# EAGLE board circuitPendulumController01 (EAGLE 6.6.0)
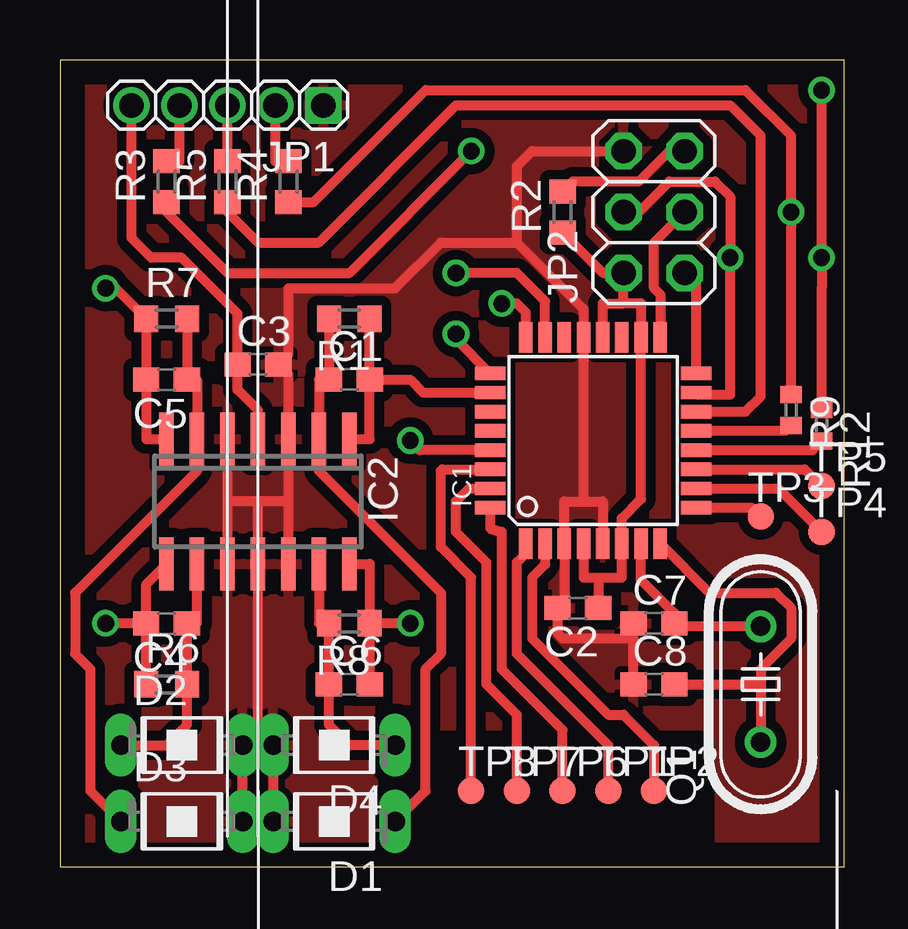
[diagram p0: board, top side]
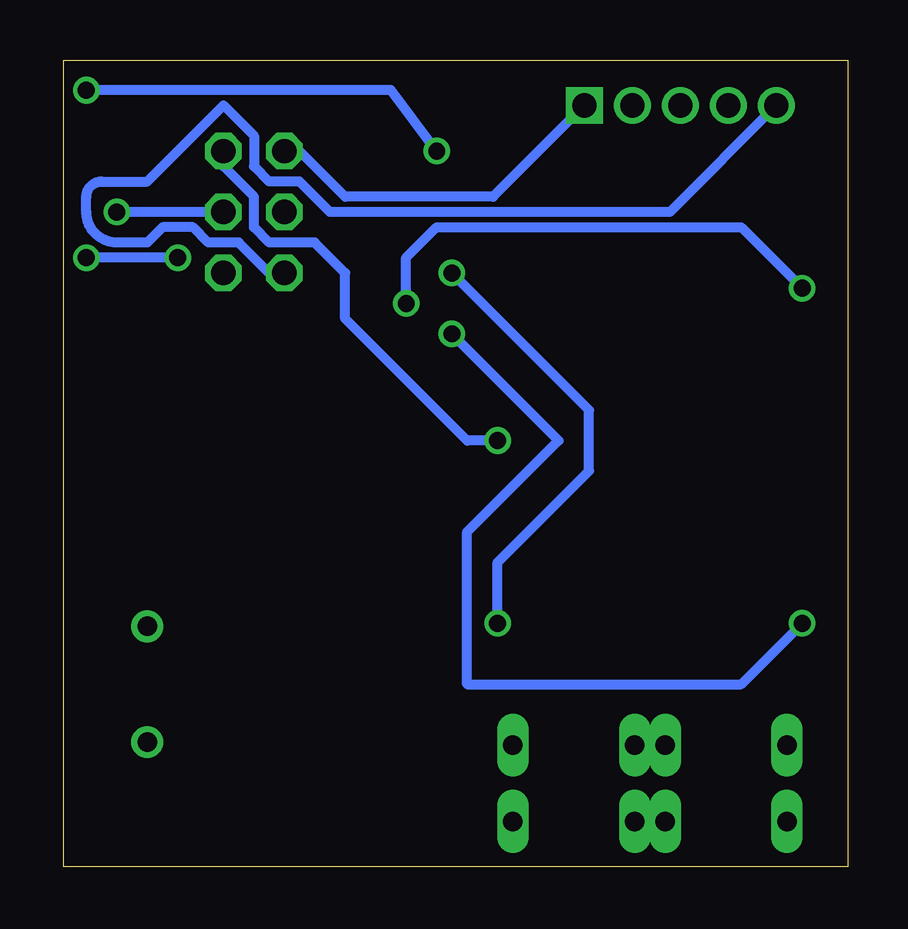
[diagram p1: board, bottom side, seen from below]

Size 32.69 x 33.65 mm. Coordinates in mm from the lower left corner, seen from the top.
Outline: 0,0 32.69,0 32.69,33.65 0,33.65 0,0
Copper layers (1*16): Top 0.035mm / dielectric 1.5mm / Bottom 0.035mm
Design rules "default": minimum track width 10mil, minimum drill 24mil, track to track 8mil, track to pad 8mil, pad to pad 8mil, via to via 8mil, smd to smd 8mil, copper to edge 40mil, drill to drill 8mil, minimum pad ring 10mil, minimum via ring 8mil, stop-mask expansion 4mil, vias tented up to drill 0mil, thermal gap 10mil
tRestrict: area 15.2,0 to 26.7,5.1

## Footprints (pad centres in the part's own frame; a part is rotated, then mirrored left to right if it is on the bottom)
C0603 = smd 1.1 x 1: 1 -0.85,0; 2 0.85,0
BPW32 = drill 0.813 long: A 0,2.54; K 0,-2.54
TQFP32-08 = smd 1.27 x 0.559: 1 -4.293,2.8; 2 -4.293,2; 3 -4.293,1.2; 4 -4.293,0.4; 5 -4.293,-0.4; 6 -4.293,-1.2; 7 -4.293,-2; 8 -4.293,-2.8; 17 4.293,-2.8; 18 4.293,-2; 19 4.293,-1.2; 20 4.293,-0.4; 21 4.293,0.4; 22 4.293,1.2; 23 4.293,2; 24 4.293,2.8 | smd 0.559 x 1.27: 9 -2.8,-4.293; 10 -2,-4.293; 11 -1.2,-4.293; 12 -0.4,-4.293; 13 0.4,-4.293; 14 1.2,-4.293; 15 2,-4.293; 16 2.8,-4.293; 25 2.8,4.293; 26 2,4.293; 27 1.2,4.293; 28 0.4,4.293; 29 -0.4,4.293; 30 -1.2,4.293; 31 -2,4.293; 32 -2.8,4.293
SO14 = smd 0.6 x 2.2: 1 -3.81,-2.6; 2 -2.54,-2.6; 3 -1.27,-2.6; 4 0,-2.6; 5 1.27,-2.6; 6 2.54,-2.6; 7 3.81,-2.6; 8 3.81,2.6; 9 2.54,2.6; 10 1.27,2.6; 11 0,2.6; 12 -1.27,2.6; 13 -2.54,2.6; 14 -3.81,2.6
1_05X2MM = drill 1.016 pad 1.3 square: 1 -4,0 | drill 1.016 pad 1.3: 2 0,0; 3 -2,0; 4 2,0; 5 4,0
2X03 = drill 1.016 octagon: 1 -2.54,-1.27; 2 -2.54,1.27; 3 0,-1.27; 4 0,1.27; 5 2.54,-1.27; 6 2.54,1.27
HC49/S = drill 0.813: 1 -2.413,0; 2 2.413,0
R0603 = smd 1 x 1.1: 1 -0.85,0; 2 0.85,0
R0402 = smd 0.7 x 0.9: 1 -0.65,0; 2 0.65,0
TP11R = smd 1.1 x 1.1: TP 0,0

## Placement (x,y rotation side)
C1  10pF  [C0603]  12.06,20.32 0 top
C2  100nF  [C0603]  21.59,10.79 180 top
C3  100nF  [C0603]  8.26,20.95 0 top
C4  10pF  [C0603]  4.45,10.16 180 top
C5  10pF  [C0603]  4.45,20.32 180 top
C6  10pF  [C0603]  12.06,7.62 0 top
C7  22pF  [C0603]  24.77,10.16 0 top
C8  22pF  [C0603]  24.77,7.62 0 top
D1  BPW32  [BPW32]  11.43,1.91 90 top
D2  BPW32  [BPW32]  5.08,5.08 270 top
D3  BPW32  [BPW32]  5.08,1.91 270 top
D4  BPW32  [BPW32]  11.43,5.08 90 top
IC1  MEGA8-AI  [TQFP32-08]  22.23,17.78 90 top
IC2  LM324D  [SO14]  8.26,15.24 180 top
JP1  Out  [1_05X2MM]  6.99,31.75 180 top
JP2  ICSP  [2X03]  24.77,27.3 90 top
Q1  16MHz  [HC49/S]  29.21,7.62 90 top
R1  1MOhm  [R0603]  12.06,22.86 180 top
R2  10kOhm  [R0603]  20.95,27.3 90 top
R3  100Ohm  [R0603]  4.45,28.57 90 top
R4  100Ohm  [R0603]  9.53,28.57 90 top
R5  100Ohm  [R0603]  6.99,28.57 90 top
R6  1MOhm  [R0603]  4.45,7.62 0 top
R7  1MOhm  [R0603]  4.45,22.86 0 top
R8  1MOhm  [R0603]  12.06,10.16 180 top
R9  JP1  [R0402]  30.48,19.05 270 top
R12  JP2  [R0402]  31.75,18.41 270 top
TP1  TPTP11R  [TP11R]  22.86,3.17 0 top
TP2  TPTP11R  [TP11R]  24.77,3.17 0 top
TP3  TPTP11R  [TP11R]  29.21,14.61 0 top
TP4  TPTP11R  [TP11R]  31.75,13.97 0 top
TP5  TPTP11R  [TP11R]  31.75,15.88 0 top
TP6  TPTP11R  [TP11R]  20.95,3.17 0 top
TP7  TPTP11R  [TP11R]  19.05,3.17 0 top
TP8  TPTP11R  [TP11R]  17.14,3.17 0 top

## Library data of the parts
C1-C8 R1-R9 R12 = resistor
D1-D4 = opto-trans-siemens; OC_FARNELL: unknown; OC_NEWARK: unknown
IC1 = atmel; MPN: ATMEGA8-16AU; OC_FARNELL: 9171371; OC_NEWARK: 73M8863
IC2 = linear
JP1 JP2 = pinhead
Q1 = crystal; OC_FARNELL: 1667008; OC_NEWARK: unknown
TP1-TP8 = testpad

## Nets
GND: C2.2 C3.2 C7.1 C8.1 D1.A D2.A D3.A D4.A IC1.3 IC1.5 IC1.21 IC2.3 IC2.5 IC2.10 IC2.11 IC2.12 JP1.1 JP2.6
MISO: IC1.16 JP2.1
MOSI: IC1.15 JP2.4 R3.1 R12.1
N$3: IC1.12 R12.2
N$4: IC1.13 R9.2
N$6: IC1.14 R5.1
N$7: C4.2 IC1.25 IC2.8 R6.1
N$8: C1.1 D1.K IC2.2 R1.2
N$9: C5.1 D3.K IC2.6 R7.2
N$10: C5.2 IC1.24 IC2.7 R7.1
N$11: C1.2 IC1.26 IC2.1 R1.1
N$12: C6.2 IC1.23 IC2.14 R8.1
N$13: C6.1 D4.K IC2.13 R8.2
N$14: C4.1 D2.K IC2.9 R6.2
N$15: C7.2 IC1.7 Q1.2
N$16: C8.2 IC1.8 Q1.1
N$17: IC1.1 TP1.TP
N$18: IC1.2 TP2.TP
N$19: IC1.9 TP3.TP
N$20: IC1.10 TP4.TP
N$21: IC1.11 TP5.TP
N$22: IC1.32 TP6.TP
N$23: IC1.31 TP7.TP
N$24: IC1.30 TP8.TP
RCK_OUT: JP1.2 R5.2
RST: IC1.29 JP2.5 R2.2
SCK: IC1.17 JP2.3 R4.1 R9.1
SCK_OUT: JP1.3 R4.2
SER_OUT: JP1.4 R3.2
VCC: C2.1 C3.1 IC1.4 IC1.6 IC1.18 IC1.20 IC2.4 JP1.5 JP2.2 R2.1

## Tracks (layer width: path | path; a pad name or v marks a point on that pad's centre or on a via)
GND
  Top 0.406: 9.53,15.24 IC2.3 9.53,20.54 C3.2 9.53,21.38 9.53,24.13 13.97,24.13 15.88,26.04 19.05,26.04 | IC2.10 6.99,15.24 | 6.99,15.24 IC2.5 | IC2.12 9.53,15.24 | 9.53,15.24 8.26,15.24 | 8.26,15.24 6.99,15.24 | IC1.5 22.62,15.24 21.82,15.24 | 21.82,15.24 21.02,15.24 IC1.3 21.02,11.08 C2.2 20.74,9.74 20.95,9.53 23.91,9.53 | 8.26,15.24 IC2.11 8.26,5.08 | 8.26,5.08 D2.A D3.A D1.A D4.A 8.26,5.08 | C8.1 23.91,9.53 | 23.91,9.53 C7.1 | JP2.6 19.68,29.84 19.05,29.21 19.05,26.04 | 19.05,26.04 21.82,23.26 IC1.21 21.82,15.24
  Bottom 0.406: JP1.1 14.79,27.94 20.95,27.94 22.86,29.84 JP2.6
  pour Top (isolate 0.406): 0,0 0,33.66 33.02,33.66 33.02,0
MISO
  Top 0.406: JP2.1 26.52,24.77 IC1.16
MOSI  (via drill 0.7)
  Top 0.406: IC1.15 26.61,19.68 27.94,19.68 v27.94,25.4 27.94,27.94 27.3,28.57 25.4,28.57 24.13,27.3 JP2.4 | R3.1 4.45,27.3 6.99,24.77 12.06,24.77 v17.14,29.84 | R12.1 31.75,24.13 v31.75,25.4 v31.75,32.38
  Bottom 0.406: v17.14,29.84 19.05,32.38 v31.75,32.38 | v27.94,25.4 v31.75,25.4
N$3
  Top 0.406: IC1.12 31.36,17.38 R12.2
N$4
  Top 0.406: R9.2 30.26,18.18 IC1.13
N$6
  Top 0.406: R5.1 6.99,27.3 8.26,26.04 10.79,26.04 16.51,31.75 27.94,31.75 29.21,30.48 29.21,19.61 28.57,18.98 IC1.14
N$7  (via drill 0.7)
  Top 0.406: C4.2 3.6,11.79 IC2.8 | R6.1 C4.2 | C4.2 v1.91,10.16 | IC1.25 16.51,22 v16.51,22.23
  Bottom 0.406: 15.88,21.59 v16.51,22.23 12.06,17.78 15.88,13.97 15.88,7.62 4.45,7.62 v1.91,10.16
N$8
  Top 0.406: R1.2 C1.1 10.79,20.32 IC2.2 10.79,16.51 15.88,11.43 15.88,8.89 15.24,8.26 15.24,3.17 D1.K
N$9
  Top 0.406: R7.2 C5.1 5.71,20.32 IC2.6 5.71,16.51 0.64,11.43 0.64,8.89 1.27,8.26 1.27,3.17 D3.K
N$10  (via drill 0.7)
  Top 0.406: IC2.7 3.6,17.84 C5.2 R7.1 2.33,24.13 v1.91,24.13 | IC1.24 19.43,23.12 19.05,23.5 v18.41,23.5
  Bottom 0.406: v18.41,23.5 18.41,25.4 17.14,26.67 4.45,26.67 v1.91,24.13
N$11
  Top 0.406: IC2.1 12.91,17.84 C1.2 | C1.2 R1.1 | C1.2 14.61,20.32 15.14,19.78 IC1.26
N$12  (via drill 0.7)
  Top 0.406: IC2.14 12.91,12.64 R8.1 | R8.1 C6.2 | v14.61,10.16 R8.1 | IC1.23 20.23,23.59 19.05,24.77 v16.51,24.77
  Bottom 0.406: v14.61,10.16 14.61,12.7 10.79,16.51 10.79,19.05 v16.51,24.77
N$13
  Top 0.406: IC2.13 10.79,10.16 R8.2 C6.1 11.21,5.93 12.06,5.08 D4.K
N$14
  Top 0.406: IC2.9 5.71,10.16 C4.1 R6.2 5.29,5.93 4.45,5.08 D2.K
N$15
  Top 0.406: IC1.7 24.23,11.97 25.61,10.58 C7.2 25.74,10.03 Q1.2
N$16
  Top 0.406: IC1.8 27.08,11.43 29.84,11.43 30.48,10.79 30.48,9.53 29.21,8.26 29.21,7.62 | 29.21,7.62 Q1.1 | C8.2 29.21,7.62
N$17
  Top 0.406: IC1.1 19.43,13.07 19.05,12.7 19.05,8.89 22.86,5.08 TP1.TP
N$18
  Top 0.406: IC1.2 20.23,12.61 19.68,12.06 19.68,9.53 22.86,6.35 23.5,6.35 24.77,5.08 TP2.TP
N$19
  Top 0.406: IC1.9 28.84,14.98 TP3.TP
N$20
  Top 0.406: IC1.10 29.94,15.78 TP4.TP
N$21
  Top 0.406: IC1.11 31.05,16.58 TP5.TP
N$22
  Top 0.406: IC1.32 17.93,14.12 18.41,13.97 18.41,8.26 20.95,5.71 TP6.TP
N$23
  Top 0.406: TP7.TP 19.05,6.35 17.78,7.62 17.78,12.7 16.51,13.97 16.51,15.24 17.05,15.78 IC1.31
N$24
  Top 0.406: TP8.TP 17.14,12.06 15.88,13.34 15.88,16.51 15.95,16.58 IC1.30
N$25
  pour Top (isolate 0.406): -0.64,-0.64 -0.64,34.29 33.66,34.29 33.66,-0.64
RCK_OUT
  Top 0.406: R5.2 JP1.2
RST  (via drill 0.7)
  Top 0.406: JP2.5 25.4,29.84 24.13,28.57 21.38,28.57 R2.2 | IC1.29 15.01,17.38 v14.61,17.78
  Bottom 0.406: v14.61,17.78 15.88,17.78 20.95,22.86 20.95,24.77 22.23,26.04 24.13,26.04 24.77,26.67 24.77,27.94 26.04,29.21 JP2.5
SCK  (via drill 0.7 pad 0.61)
  Top 0.406: IC1.17 25.02,23.87 24.77,24.13 24.77,26.04 JP2.3 | R9.1 30.48,26.67 v30.48,27.3 30.48,30.48 28.57,32.38 15.24,32.38 10.58,27.73 R4.1
  Bottom 0.406: JP2.3 v30.48,27.3
SCK_OUT
  Top 0.406: R4.2 8.98,29.43 JP1.3
SER_OUT
  Top 0.406: R3.2 4.99,29.43 JP1.4
VCC
  Top 0.406: IC1.4 21.82,12.06 22.44,12.06 | 22.44,12.06 23.43,12.06 IC1.6 23.43,14.54 24.23,15.34 IC1.18 24.23,23.5 23.5,23.5 | 22.44,12.06 C2.1 | IC2.4 8.26,19.05 7.41,19.9 C3.1 7.41,23.07 5.08,25.4 3.81,25.4 2.98,26.23 JP1.5 | R2.1 22.64,24.77 JP2.2 23.5,23.5 | IC1.20 22.62,23.5 23.5,23.5
  Bottom 0.406: JP1.5 7.43,27.3 21.59,27.3 22.86,28.57 24.13,28.57 24.77,29.21 24.77,30.48 26.04,31.75 29.21,28.57 31.11,28.57 arc-90 31.75,27.94 31.75,27.3 arc-90 30.48,26.04 29.21,26.04 28.57,26.67 27.3,26.67 26.67,26.04 25.4,26.04 24.13,24.77 JP2.2